# Altium PCB Team12.PcbDoc
Units mil, origin at the board's own origin, x right, y up, seen from the top; angles counter-clockwise.
Board outline 3900 x 3900 mil, 4 copper layers (Top Layer, GND, PWR, Bottom Layer); 54 components, 57 nets, 327 pads, 41 vias.
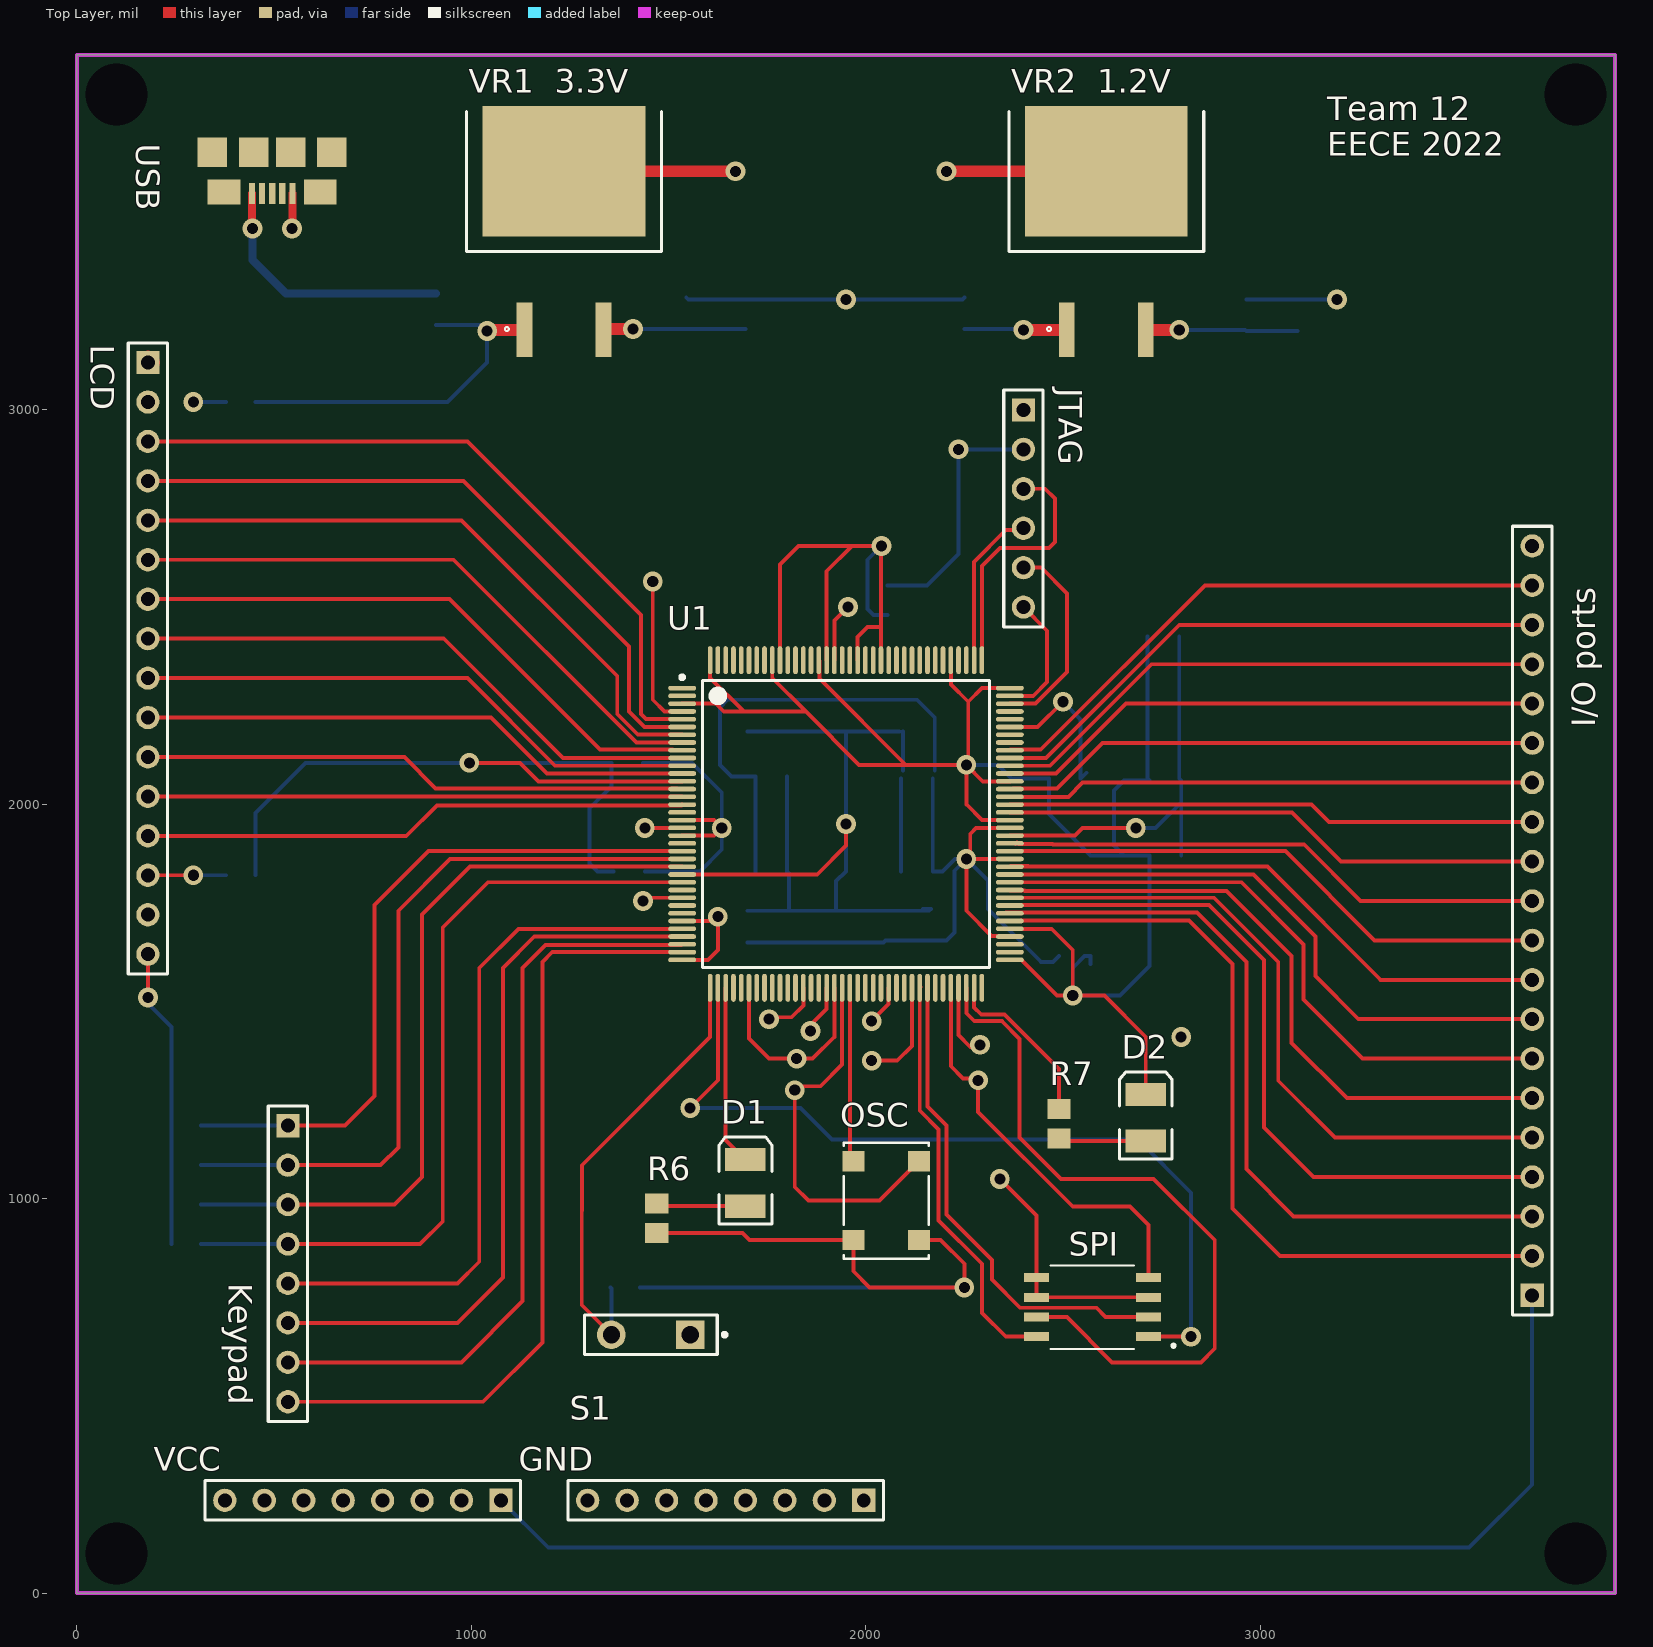
[diagram p0: Top Layer view]
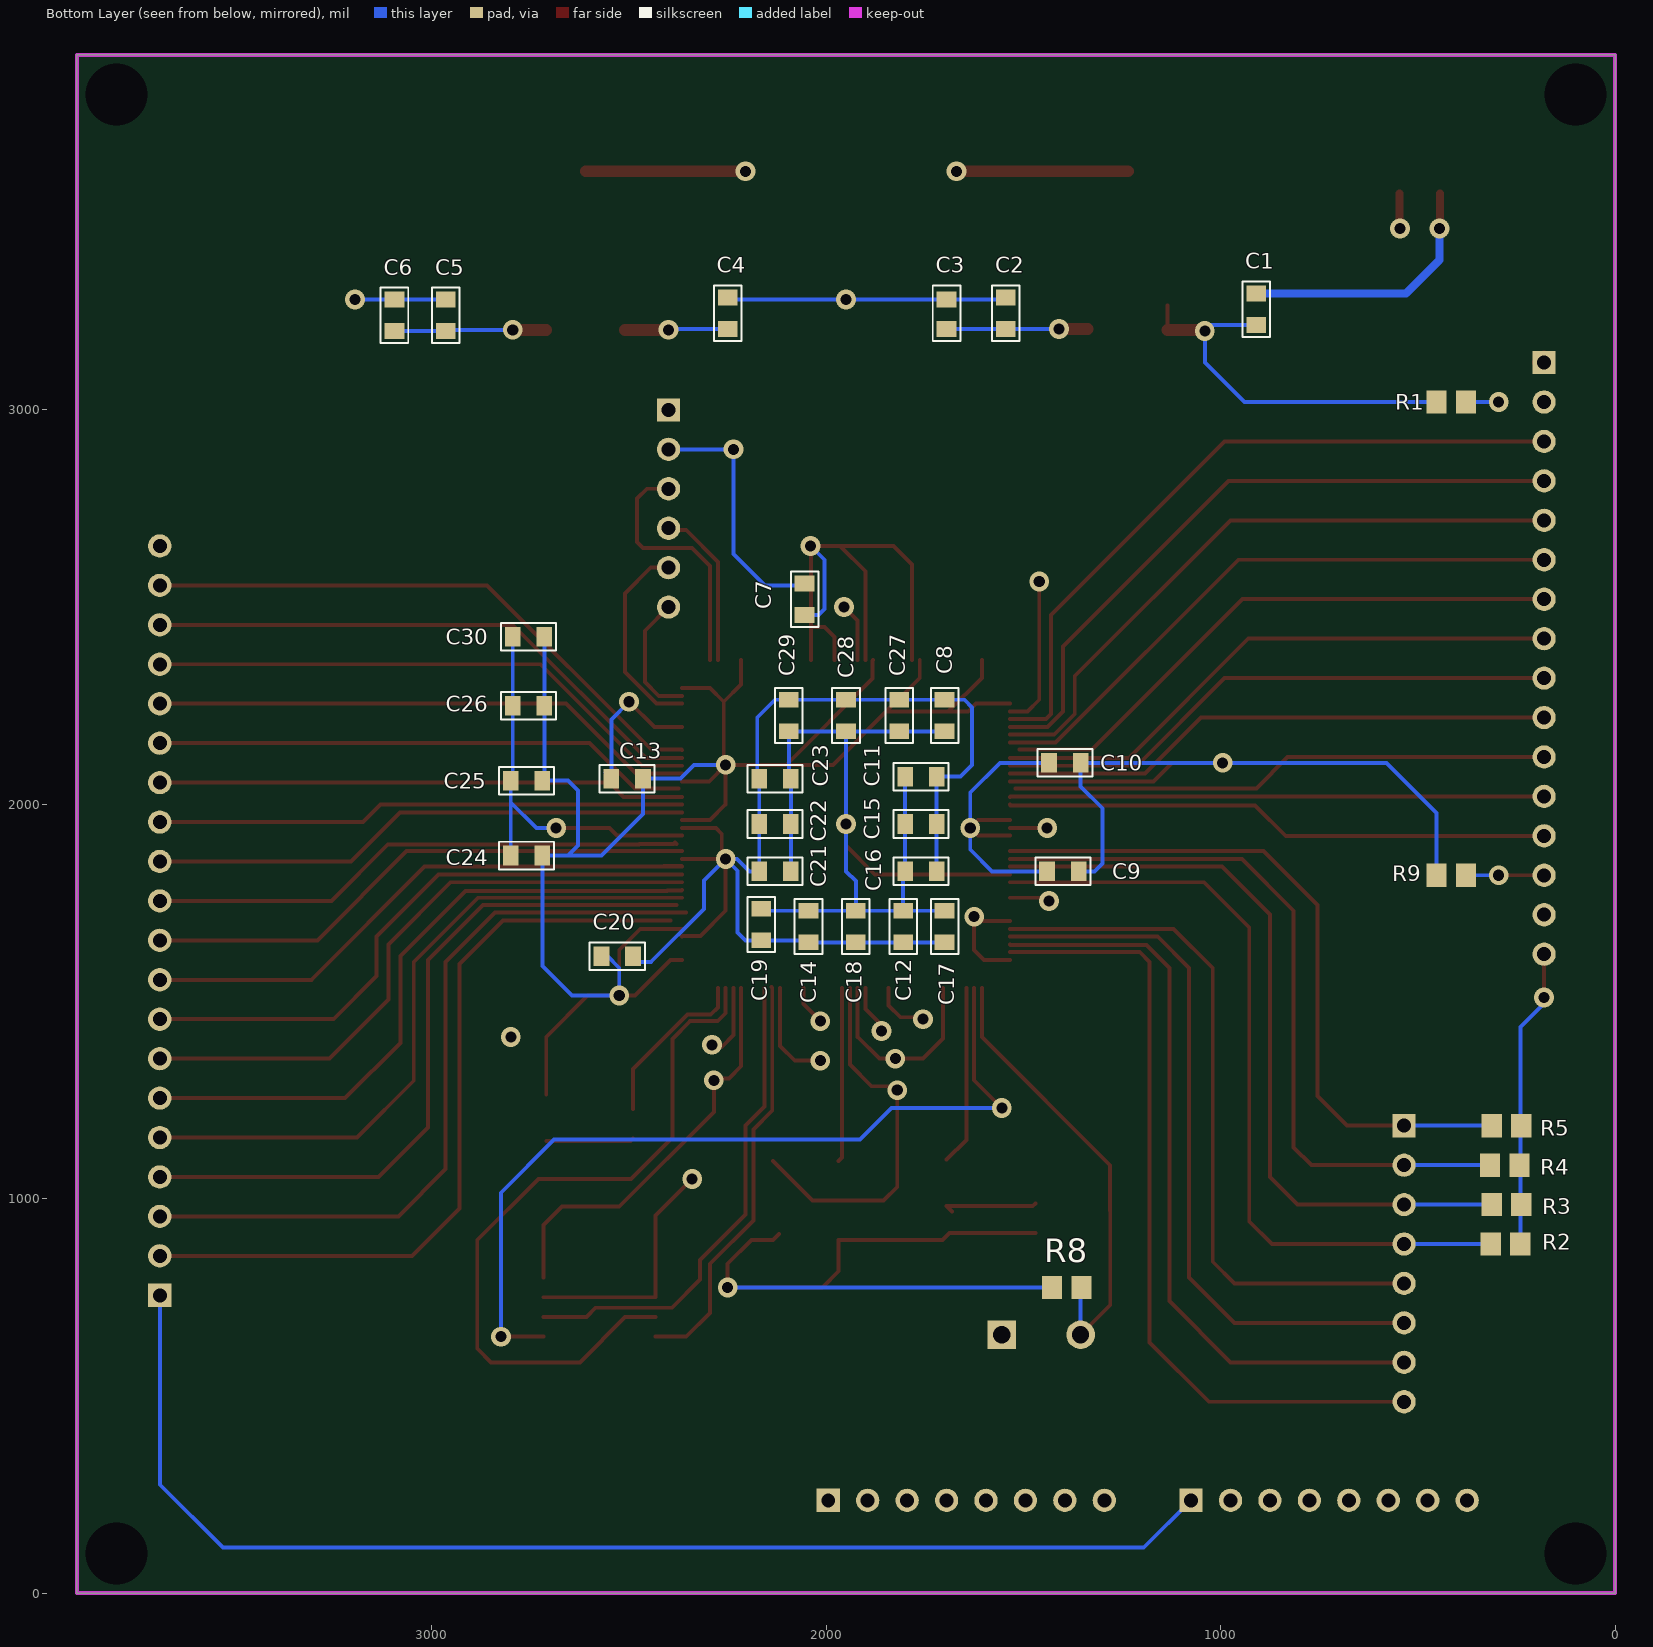
[diagram p1: Bottom Layer view, seen from below]
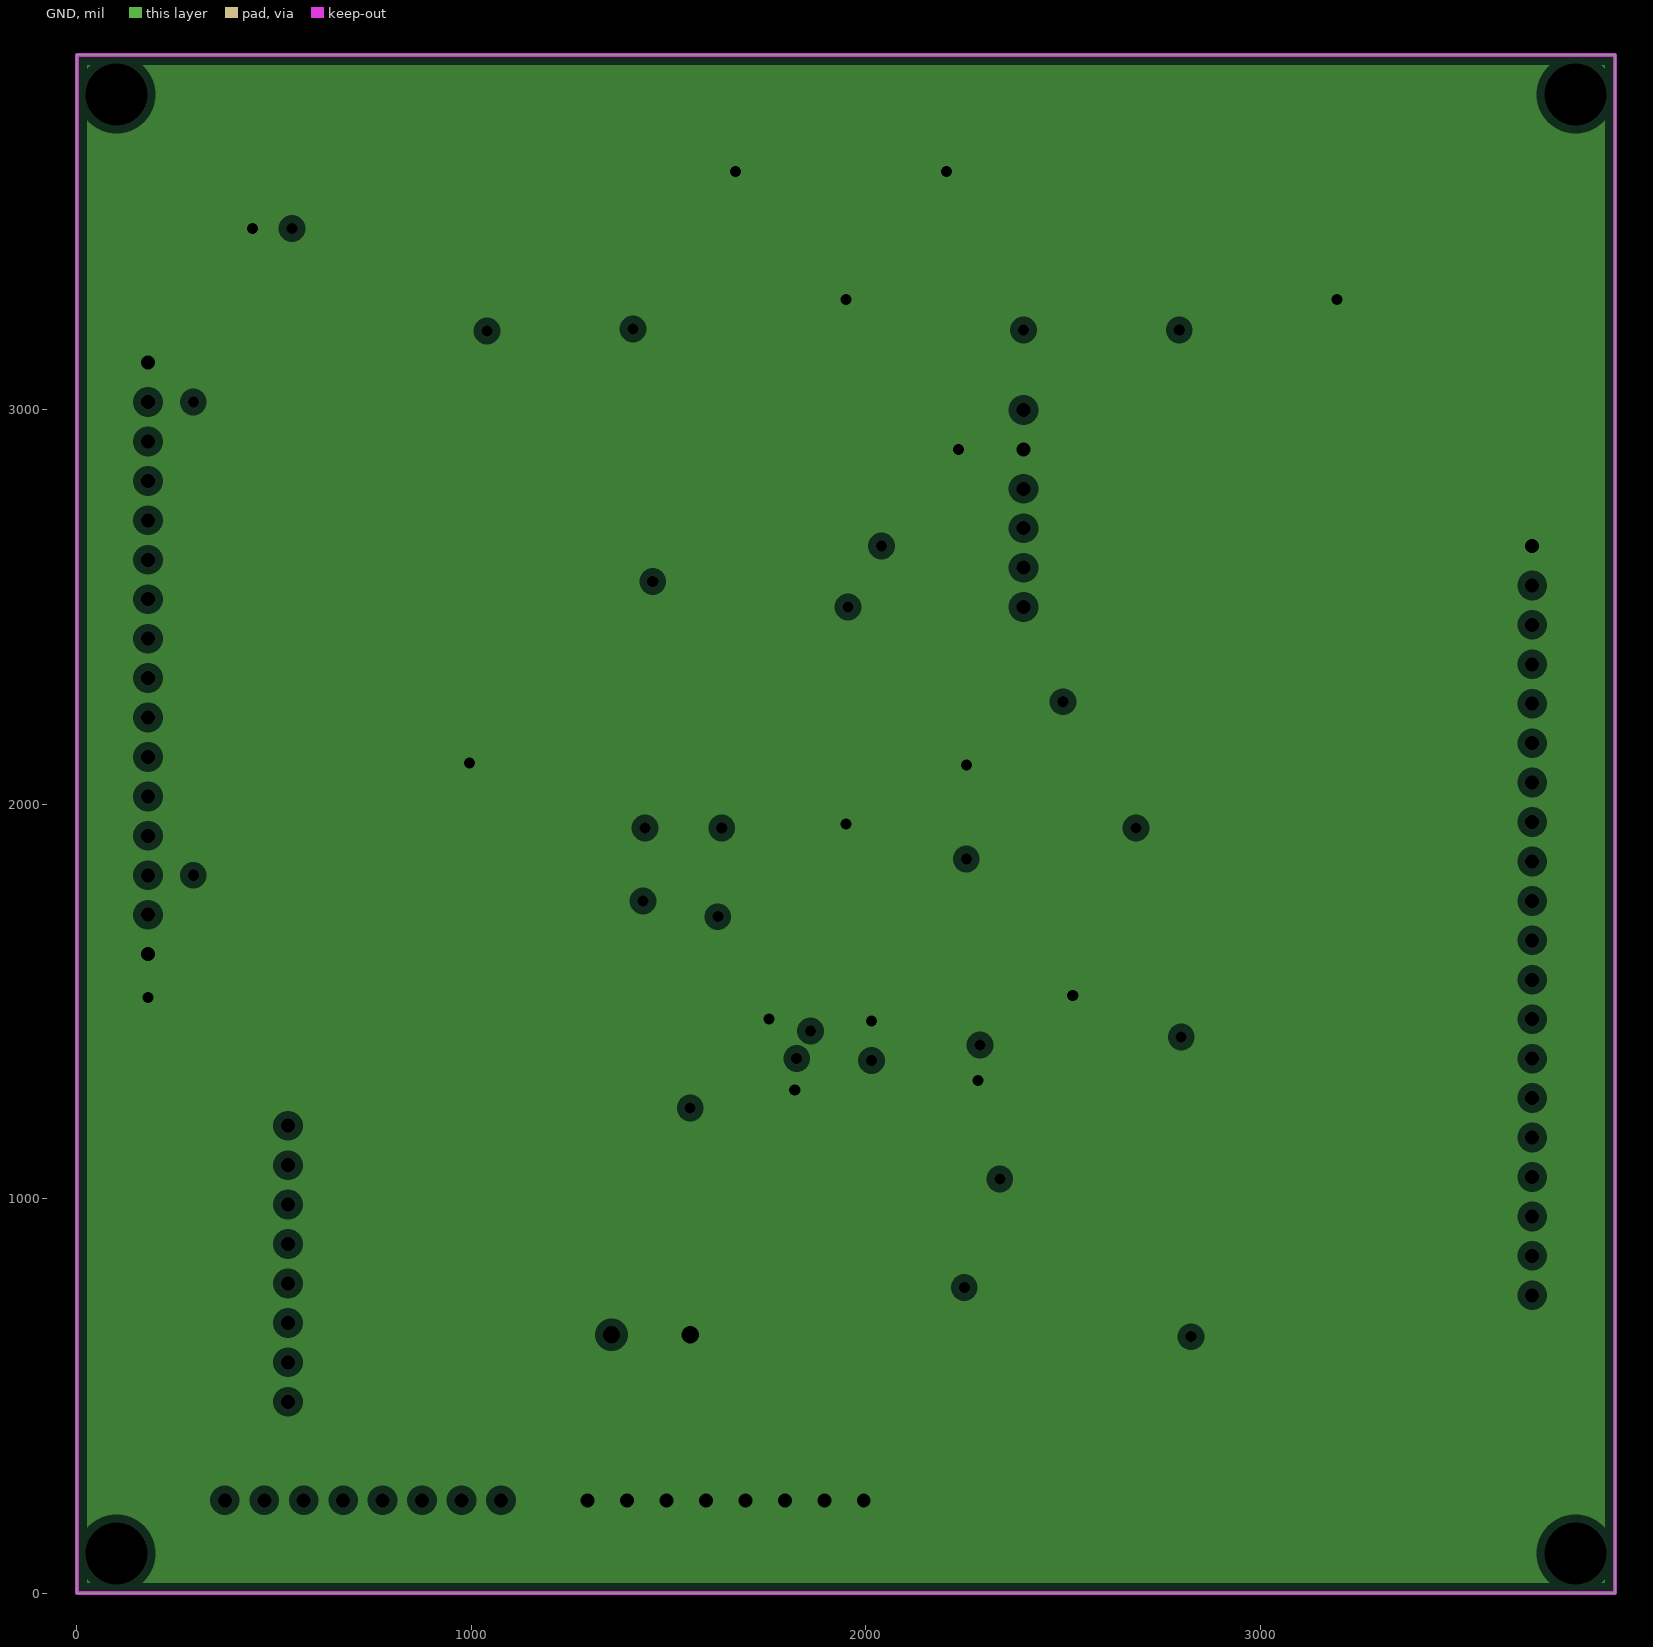
[diagram p2: GND, clearances drawn from the general rule]
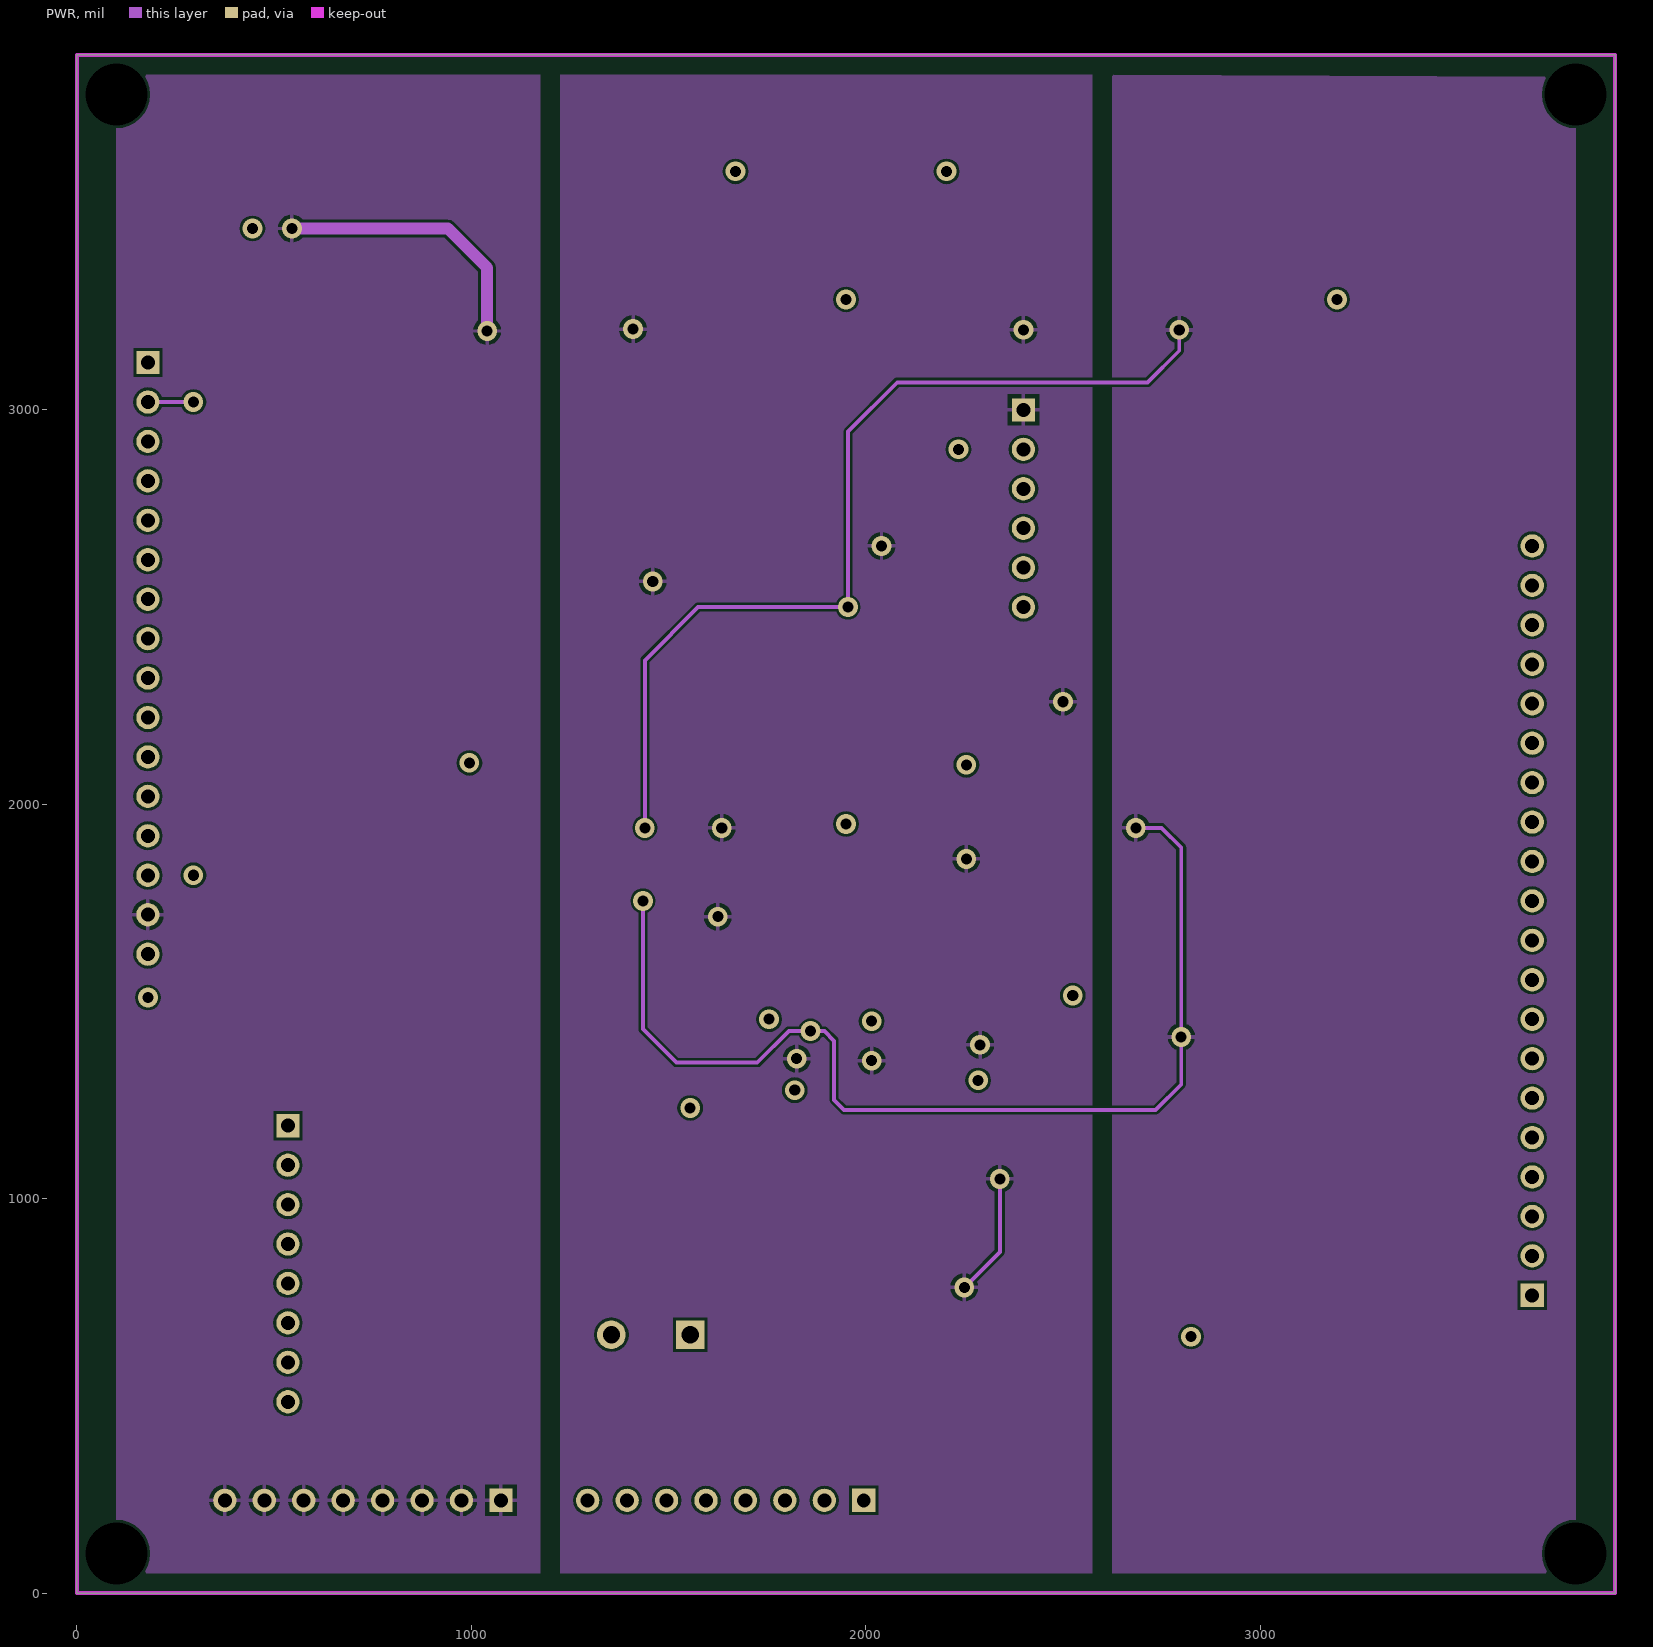
[diagram p3: PWR]

## Layer stack, top to bottom
Top Solder: solder mask 0.4, Solder Resist, Dk 3.5
Top Layer: signal copper 1.4
Dielectric 1: dielectric 12.6, FR-4, Dk 4.8
GND: plane copper 1.417, net GND
Dielectric 2: dielectric 12.6, Dk 4.2
PWR: signal copper 1.417
Dielectric 3: dielectric 12.6, Dk 4.2
Bottom Layer: signal copper 1.4
Bottom Solder: solder mask 0.4, Solder Resist, Dk 3.5

## Board outline
0,0 0,3900 3900,3900 3900,0

## Design rules (kind name [scope] priority, off if disabled: settings)
Clearance [All] p1: gap=7 ignorepadtopadclearanceinfootprint=FALSE
FabricationTestPointUsage [All] p1: valid=0 allowmultiple=TRUE
HoleSize [All] p1: absolutevalues=TRUE maxlimit=157.48 minlimit=1 maxpercent=80.000 minpercent=20.000
MinimumSolderMaskSliver [All] p1: minsoldermaskwidth=1
PlaneClearance [All] p1: clearance=20
PlaneConnect [All] p1: planeconnectstyle=Relief reliefexpansion=20 reliefentries=4 reliefconductorwidth=10 reliefairgap=10
PolygonConnect [All] p1: connectstyle=Relief reliefconductorwidth=10 reliefentries=4 polygonreliefangle="90 Angle" airgapwidth=10
RoutingVias [All] p1: holewidth=28 width=50 viastyle="Through Hole" minholewidth=28 minwidth=50 maxholewidth=28 maxwidth=50
SilkToSilkClearance [All] p1: silktosilkclearance=1
SilkToSolderMaskClearance [IsPad] p1: minsilkscreentomaskgap=1 clearancetoexposedcopper=TRUE
SolderMaskExpansion [All] p1: expansion=4
Width [All] p1: maxlimit=30 minlimit=10 preferedwidth=10
23 further rules are at their usual default settings.

## Components (designator, comment, footprint, x,y, rotation, side; value= is the part's Value field where it differs from the comment)
C1 "150uF" 0805C-TBD#1 910,3225 r90 bottom locked
C2 "150uF" 0805C-TBD#1 1545,3215 r90 bottom
C3 "10uF" 0805C-TBD#2 1695,3215 r90 bottom
C4 "150uF" 0805C-TBD#1 2250,3215 r90 bottom
C5 "150uF" 0805C-TBD#1 2965,3210 r90 bottom
C6 "10uF" 0805C-TBD#1 3095,3210 r90 bottom
C7 "4.7uF" 0805C-TBD#1 2055,2550 r270 bottom
C8 "4.7uF" 0805C-TBD#1 1700,2195 r90 bottom
C9 "0.47uF" 0805C-TBD#1 1370,1830 r0 bottom
C10 "0.47uF" 0805C-TBD#1 1365,2105 r0 bottom
C11 "4.7uF" 0805C-TBD#1 1790,2070 r180 bottom
C12 "4.7uF" 0805C-TBD#1 1805,1720 r270 bottom
C13 "4.7uF" 0805C-TBD#1 2475,2065 r0 bottom locked
C14 "4.7uF" 0805C-TBD#1 2045,1720 r270 bottom
C15 "4.7uF" 0805C-TBD#1 1790,1950 r180 bottom
C16 "4.7uF" 0805C-TBD#1 1790,1830 r180 bottom
C17 "0.47uF" 0805C-TBD#1 1700,1720 r270 bottom
C18 "0.47uF" 0805C-TBD#1 1925,1720 r270 bottom
C19 "4.7uF" 0805C-TBD#1 2165,1725 r270 bottom
C20 "0.47uF" 0805C-TBD#1 2560,1615 r180 bottom
C21 "0.47uF" 0805C-TBD#1 2100,1830 r0 bottom
C22 "0.47uF" 0805C-TBD#1 2100,1950 r0 bottom
C23 "4.7uF" 0805C-TBD#1 2100,2065 r0 bottom
C24 "4.7uF" 0805C-TBD#1 2730,1870 r0 bottom
C25 "4.7uF" 0805C-TBD#1 2730,2060 r0 bottom
C26 "4.7uF" 0805C-TBD#1 2725,2250 r0 bottom
C27 "0.47uF" 0805C-TBD#1 1815,2255 r270 bottom
C28 "0.47uF" 0805C-TBD#1 1950,2255 r270 bottom
C29 "4.7uF" 0805C-TBD#1 2095,2255 r270 bottom
C30 "0.47uF" 0805C-TBD#1 2725,2425 r0 bottom locked
D1 "LED3" DSO-C2/D5.6 1695,1040 r90 top
D2 "LED3" DSO-C2/D5.6 2710,1205 r90 top
GND "Header 8" HDR1X8 1995,235 r180 top
"I/O ports" "Header 20" HDR1X20 3690,755 r90 top locked
JTAG "Header 6" HDR1X6 2400,3000 r270 top locked
Keypad "Header 8" HDR1X8 535,1185 r270 top locked
LCD "Header 16" HDR1X16 180,3120 r270 top locked
OSC "CB3LV-3I-25M000000" CRYS_CB3LV-3I-01 2052,995 r180 top locked value=Value
R1 "330" ERA-0805 415,3020 r180 bottom
R2 "10K" ERA-0805 277.6,885 r0 bottom
R3 "10K" ERA-0805 275,985 r0 bottom
R4 "10K" ERA-0805 280,1085 r0 bottom
R5 "10K" ERA-0805 275,1185 r0 bottom
R6 "330" ERA-0805 1470,950 r270 top
R7 "330" ERA-0805 2490,1190 r90 top
R8 "4.7K" ERA-0805 1390,775 r0 bottom
R9 "5K" ERA-0805 415,1820 r180 bottom
S1 "SW-PB" SPST-2 1455,655 r180 top
SPI "SOIC127P790X216-8N" *SOIC127P790X216-8N 2575,725 r180 top
U1 "XC6SLX9-2TQG144C" TQG144_N 1950,1950 r0 top
USB "10118192-0001LF" 10118192-0001LF_10118192-0001LF(Primary) 495,3710 r180 top (schematic designator "USB Port B")
VCC "Header 8" HDR1X8 1075,235 r180 top
"VR1  3.3V" "3.3V" *D2PAK_MC7805ACD2TG(Primary) 1235,3355 r90 top (schematic designator VR1)
"VR2  1.2V" "1.2V" *D2PAK_MC7805ACD2TG(Primary) 2610,3355 r90 top (schematic designator VR2)

## Footprints (in the part's own frame and the unit in brackets; to place one, negate y for a bottom-side part, rotate by r counter-clockwise, add the part's x,y. Pads: shape width x height; smd on the part's side, far side on the other; paste and mask are expansions set on the pad)
0805C-TBD#1 [mil] "CAPACITOR 0805"
  rect 40x50 smd: 1(-10,0) 2(70,0)
  silkscreen extent -40,-35 100,35, body extent -11,-25 70,25, height 26
0805C-TBD#2 [mil] "CAPACITOR 0805"
  rect 40x50 smd: 1(-10,0) 2(65,0)
  silkscreen extent -40,-35 100,35, body extent -11,-25 70,25, height 26
10118192-0001LF_10118192-0001LF(Primary) [mm]
  rect 0.4x1.35 smd: 1(-1.3,4.1) 2(-0.65,4.1) 3(0,4.1) 4(0.65,4.1) 5(1.3,4.1)
  rect 1.9x1.9 smd: M1(-1.2,1.45) M2(1.2,1.45) S1(-3.85,1.45) S2(3.85,1.45)
  rect 2.1x1.6 smd: S3(-3.1,4) S4(3.1,4)
*D2PAK_MC7805ACD2TG(Primary) [mil]
  rect 137.95x40 smd: 1(-152.09,100) 3(-152.09,-100)
  rect 329.92x412.99 smd: TAB(250,0)
  silkscreen extent -155,-247 401,247
*SOIC127P790X216-8N [mm]
  rect 1.61x0.58 smd: 1(-3.605,1.905) 2(-3.605,0.635) 3(-3.605,-0.635) 4(-3.605,-1.905) 5(3.605,-1.905) 6(3.605,-0.635) 7(3.605,0.635) 8(3.605,1.905)
  silkscreen extent -5.32,-2.69 2.69,2.69
CRYS_CB3LV-3I-01 [mil]
  rect 55x51 smd paste+0 mask+0: 1(-83,100) 2(-83,-100) 3(83,-100) 4(83,100)
  silkscreen extent -108,-147 108,147, body extent 0,0 10,10, height 10
DSO-C2/D5.6 [mm] "SM LED; 2 C-Bend Leads; Body 3.5 x 2.8 x 1.9 mm, inc leads (LxWxH typ)"
  rect 1.5x2.6 smd: 1(-1.5,0) 2(1.5,0)
  silkscreen extent -2.65,-1.7 2.95,1.7
ERA-0805 [mm] "Chip Resistor; Body 2 x 1.3 mm (LxW typ)"
  rect 1.3x1.5 smd: 1(-0.95,0) 2(0.95,0)
HDR1X6 [mm] "Connector; Header; 6 Position"
  rect 1.5x1.5 hole 0.9: 1(0,0)
  round 1.5 hole 0.9: 2(2.54,0) 3(5.08,0) 4(7.62,0) 5(10.16,0) 6(12.7,0)
  silkscreen extent -1.27,-1.27 13.97,1.27
HDR1X8 [mm] "Connector; Header; 8 Position"
  rect 1.5x1.5 hole 0.9: 1(0,0)
  round 1.5 hole 0.9: 2(2.54,0) 3(5.08,0) 4(7.62,0) 5(10.16,0) 6(12.7,0) 7(15.24,0) 8(17.78,0)
  silkscreen extent -1.27,-1.27 19.05,1.27
HDR1X16 [mm] "Connector; Header; 16 Position"
  rect 1.5x1.5 hole 0.9: 1(0,0)
  round 1.5 hole 0.9: 2(2.54,0) 3(5.08,0) 4(7.62,0) 5(10.16,0) 6(12.7,0) 7(15.24,0) 8(17.78,0) 9(20.32,0) 10(22.86,0) 11(25.4,0) 12(27.94,0) 13(30.48,0) 14(33.02,0) 15(35.56,0) 16(38.1,0)
  silkscreen extent -1.27,-1.27 39.37,1.27
HDR1X20 [mm] "Connector; Header; 20 Position"
  rect 1.5x1.5 hole 0.9: 1(0,0)
  round 1.5 hole 0.9: 2(2.54,0) 3(5.08,0) 4(7.62,0) 5(10.16,0) 6(12.7,0) 7(15.24,0) 8(17.78,0) 9(20.32,0) 10(22.86,0) 11(25.4,0) 12(27.94,0) 13(30.48,0) 14(33.02,0) 15(35.56,0) 16(38.1,0) 17(40.64,0) 18(43.18,0) 19(45.72,0) 20(48.26,0)
  silkscreen extent -1.27,-1.27 49.53,1.27
SPST-2 [mm] "Circuit Breaker; 2 Leads"
  rect 1.85x1.85 hole 1.1: 1(-2.54,0)
  round 1.85 hole 1.1: 2(2.54,0)
  silkscreen extent -4.89,-1.27 4.28,1.27
TQG144_N [mm] "Thin QFP, 144-Leads, Body 20x20mm, Pitch 0.5mm, IPC Medium Density"
  oval 1.8x0.3 smd: 1(-10.55,8.75) 2(-10.55,8.25) 3(-10.55,7.75) 4(-10.55,7.25) 5(-10.55,6.75) 6(-10.55,6.25) 7(-10.55,5.75) 8(-10.55,5.25) 9(-10.55,4.75) 10(-10.55,4.25) 11(-10.55,3.75) 12(-10.55,3.25) 13(-10.55,2.75) 14(-10.55,2.25) 15(-10.55,1.75) 16(-10.55,1.25) 17(-10.55,0.75) 18(-10.55,0.25) 19(-10.55,-0.25) 20(-10.55,-0.75) 21(-10.55,-1.25) 22(-10.55,-1.75) 23(-10.55,-2.25) 24(-10.55,-2.75) 25(-10.55,-3.25) 26(-10.55,-3.75) 27(-10.55,-4.25) 28(-10.55,-4.75) 29(-10.55,-5.25) 30(-10.55,-5.75) 31(-10.55,-6.25) 32(-10.55,-6.75) 33(-10.55,-7.25) 34(-10.55,-7.75) 35(-10.55,-8.25) 36(-10.55,-8.75) 73(10.55,-8.75) 74(10.55,-8.25) 75(10.55,-7.75) 76(10.55,-7.25) 77(10.55,-6.75) 78(10.55,-6.25) 79(10.55,-5.75) 80(10.55,-5.25) 81(10.55,-4.75) 82(10.55,-4.25) 83(10.55,-3.75) 84(10.55,-3.25) 85(10.55,-2.75) 86(10.55,-2.25) 87(10.55,-1.75) 88(10.55,-1.25) 89(10.55,-0.75) 90(10.55,-0.25) 91(10.55,0.25) 92(10.55,0.75) 93(10.55,1.25) 94(10.55,1.75) 95(10.55,2.25) 96(10.55,2.75) 97(10.55,3.25) 98(10.55,3.75) 99(10.55,4.25) 100(10.55,4.75) 101(10.55,5.25) 102(10.55,5.75) 103(10.55,6.25) 104(10.55,6.75) 105(10.55,7.25) 106(10.55,7.75) 107(10.55,8.25) 108(10.55,8.75)
  oval 0.3x1.8 smd: 37(-8.75,-10.55) 38(-8.25,-10.55) 39(-7.75,-10.55) 40(-7.25,-10.55) 41(-6.75,-10.55) 42(-6.25,-10.55) 43(-5.75,-10.55) 44(-5.25,-10.55) 45(-4.75,-10.55) 46(-4.25,-10.55) 47(-3.75,-10.55) 48(-3.25,-10.55) 49(-2.75,-10.55) 50(-2.25,-10.55) 51(-1.75,-10.55) 52(-1.25,-10.55) 53(-0.75,-10.55) 54(-0.25,-10.55) 55(0.25,-10.55) 56(0.75,-10.55) 57(1.25,-10.55) 58(1.75,-10.55) 59(2.25,-10.55) 60(2.75,-10.55) 61(3.25,-10.55) 62(3.75,-10.55) 63(4.25,-10.55) 64(4.75,-10.55) 65(5.25,-10.55) 66(5.75,-10.55) 67(6.25,-10.55) 68(6.75,-10.55) 69(7.25,-10.55) 70(7.75,-10.55) 71(8.25,-10.55) 72(8.75,-10.55) 109(8.75,10.55) 110(8.25,10.55) 111(7.75,10.55) 112(7.25,10.55) 113(6.75,10.55) 114(6.25,10.55) 115(5.75,10.55) 116(5.25,10.55) 117(4.75,10.55) 118(4.25,10.55) 119(3.75,10.55) 120(3.25,10.55) 121(2.75,10.55) 122(2.25,10.55) 123(1.75,10.55) 124(1.25,10.55) 125(0.75,10.55) 126(0.25,10.55) 127(-0.25,10.55) 128(-0.75,10.55) 129(-1.25,10.55) 130(-1.75,10.55) 131(-2.25,10.55) 132(-2.75,10.55) 133(-3.25,10.55) 134(-3.75,10.55) 135(-4.25,10.55) 136(-4.75,10.55) 137(-5.25,10.55) 138(-5.75,10.55) 139(-6.25,10.55) 140(-6.75,10.55) 141(-7.25,10.55) 142(-7.75,10.55) 143(-8.25,10.55) 144(-8.75,10.55)
  silkscreen extent -10.67,-9.25 9.25,9.57, body extent -10,-10 10,10, height 1.6

## Part data
C1 C2 C3 C4 C5 C6 C7 C8 C9 C10 C11 C12 C13 C14 C15 C16 C17 C18 C19 C20 C21 C22 C23 C24 C25 C26 C27 C28 C29 C30: library part 0805C-27PF-50V-C0G-JOH, "CAPACITOR 0805 CERAMIC", Supplier 1=Digi-Key, Supplier 2=Digi-Key, Supplier Part Number 2=251R15S270FV4E-ND
D1 D2: "Typical BLUE SiC LED", DatasheetVersion=16-Apr-2002, LatestRevisionDate=17-Dec-2003, LatestRevisionNote="PCB Footprint replaced.", PackageReference=3.5X2.8X1.9, PackageVersion=16-Apr-2002, Published=8-Jun-2000, Publisher="Altium Limited"
GND Keypad VCC: "Header, 8-Pin", LatestRevisionDate=17-Jul-2002, LatestRevisionNote="Re-released for DXP Platform.", Publisher="Altium Limited"
"I/O ports": "Header, 20-Pin", LatestRevisionDate=17-Jul-2002, LatestRevisionNote="Re-released for DXP Platform.", Publisher="Altium Limited"
JTAG: "Header, 6-Pin", LatestRevisionDate=17-Jul-2002, LatestRevisionNote="Re-released for DXP Platform.", Publisher="Altium Limited"
LCD: "Header, 16-Pin", LatestRevisionDate=17-Jul-2002, LatestRevisionNote="Re-released for DXP Platform.", Publisher="Altium Limited"
OSC: "No Description Available", Manufacturer_Part_Number=CB3LV-3I-14M7456, Built_By=EMA_Kyle, Copyright="Copyright (C) 2018 Accelerated Designs. All rights reserved", RefDes=RefDes, SourceLibrary=CTS_Components_2020-2-18, Type=DEV, Vendor="CTS Components"
R1 R2 R3 R4 R5 R6 R7 R8 R9: library part ERA6Y, "Rectangular Thick Film Chip Resistor, 10 Ohm to 1M Ohm Range, 0.1% and 0.5% Tolerance, 0805 Size, 0.1 W", PackageDocument=Mar-2003, Code_IPC="2012 [0805]", ComponentLink1Description="Manufacturer Link", ComponentLink1URL=http://www.panasonic.com/industrial/components/resistive_products.htm, ComponentLink2Description=Datasheet, ComponentLink2URL=http://www.panasonic.com/industrial/components/pdf/AOA0000CE8.pdf, LatestRevisionDate=19-Mar-2004, LatestRevisionNote="Silkscreen size reduced.", Note="If flow soldering, adjust pad width of PCB Footprint to 0.7 - 0.8 times the width of the resistor.", PackageReference=ERA-0805, Published=17-Dec-2003, Publisher="Altium Limited"
S1: "Switch", LatestRevisionDate=17-Jul-2002, LatestRevisionNote="Re-released for DXP Platform.", PackageReference=SPST-2, Published=24-Mar-1999, Publisher="Altium Limited"
SPI: "IC FLASH 8M SPI 104MHZ 8SOIC"
U1: "Spartan-6 LX 1.2V FPGA, 102 User I/Os, 144-Pin TQFP (0.5mm Pitch), Speed Grade 2, Commercial Grade, Pb-Free", Supplier Part Number 1=XC6SLX9-2TQG144C-ND, Code_JEDEC=MS-026-BFB, ComponentLink1Description="Manufacturer Link", ComponentLink1URL=http://www.xilinx.com, ComponentLink2Description="Spartan-6 Datasheet", ComponentLink2URL=http://www.xilinx.com/support/documentation/data_sheets/ds160.pdf, ComponentLink3Description="Spartan-6 Documents", ComponentLink3URL=http://www.xilinx.com/support/documentation/spartan-6.htm, ComponentLink4Description="Xilinx.com Home", ComponentLink4URL=http://www.xilinx.com, DatasheetVersion="ver1.6, Nov-2010", PackageDescription="144-Pin Thin Quad Flat Pack (TQG144) - Pb-Free", PackageReference=TQG144, PackageVersion="ver1.2, Jun-2004", Published=17-Nov-2009, Publisher="Altium Limited", Supplier 1=Digi-Key
USB: "Conn Micro USB Type B RCP 5 POS 0.65mm Solder RA SMD 5 Terminal 1 Port T/R", Package=None, Availability=Good, MF=Amphenol, MP=10118192-0001LF, Price="0.23 USD", SnapEDA_Link=https://www.snapeda.com/parts/10118192-0001LF/Amphenol%20Solar/view-part/?ref=snap
"VR1  3.3V" "VR2  1.2V": library part MC7805ACD2TG, "Linear Voltage Regulator IC Positive Fixed 1 Output 1A D2PAK", Package="D2PAK ON Semiconductor", Availability=Unavailable, MF="ON Semiconductor", MP=MC7805ACD2TG, Price=None, SnapEDA_Link=https://www.snapeda.com/parts/MC7805ACD2TG/ON%20Semiconductor/view-part/104394/?ref=snap

## Free pads (board coordinates)
  round 0 hole 157.48: 33(100,3800) 34(3800,3800) 35(3800,100) 37(100,100)

## Via types
v1: diameter 50, hole 28, Top Layer to Bottom Layer, 41 vias

## Nets (pads, with @x,y where several pads share a name; then routed paths per layer and width w, separated by ;. In a path a pad name is that pad's centre, name@x,y a point inside that pad or via, vN(x,y) a via of type N, cw(c..) or ccw(c..) an arc to the next point about the centre after c; other vN are vias at no path point)
+1.2: "VR2  1.2V.3" C5.1 C6.1 C24.2 C25.2 C26.2 C30.2 U1.19 U1.28 U1.52 U1.89 U1.128 | length 6996.5
  Top Layer w10: v1(1435,1755) 1442.99,1762.99 U1.28 ; v1(1440,1940) 1440.16,1940.16 U1.19 ; v1(1860,1425) 1860,1440 1900.79,1480.79 U1.52 ; U1.128 1920.47,2465.47 v1(1955,2500) ; U1.89 2530.47,1920.47 2550,1940 v1(2685,1940)
  Top Layer w30: 2710,3202.91 v1(2795,3202.91)
  PWR w10: v1(1435,1755) 1435,1430 1520,1345 1725,1345 1805,1425 v1(1860,1425) 1895,1425 1920,1400 1920,1250 1945,1225 2735,1225 2800,1290 v1(2800,1410) 2800,1890 2750,1940 v1(2685,1940) ; v1(1440,1940) 1440,2365 1575,2500 v1(1955,2500) 1955,2945 2080,3070 2715,3070 2795,3150 v1(2795,3202.91)
  Bottom Layer w10: v1(2685,1940) 2735,1940 2800,2005 ; C30.2 C26.2 2795,2065 C25.2 2800,2005 ; v1(2795,3202.91) 2962.09,3202.91 C5.1 C6.1 ; C24.2 2800,2005
+3.3: "VR1  3.3V.3" "VR2  1.2V.1" C2.1 C3.1 C4.1 C7.2 C8.2 C9.2 C10.2 C11.2 C12.2 C13.2 C14.2 C15.2 C16.2 C17.2 C18.2 C19.2 C20.2 C21.2 C22.2 C23.2 C27.1 C28.1 C29.1 JTAG.1 OSC.1 OSC.4 R6.2 R8.2 SPI.3 SPI.5 SPI.6 U1.4 U1.18 U1.20 U1.31 U1.36 U1.42 U1.53 U1.63 U1.69 U1.76 U1.86 U1.90 U1.103 U1.122 U1.125 U1.129 U1.135 | length 11017.3
  Top Layer w10: 1335,3202.91 1337.09,3205 ; v1(1460,2565) 1460,2265.13 1489.7,2235.43 U1.4 ; R6.2 1687.4,912.6 1705,895 OSC.4 1969,816 2010,775 v1(2250,775) 2250,835 2190,895 OSC.1 OSC.1@2120,910 ; U1.36 1600.51,1605.51 1625,1630 v1(1625,1715) 1613.94,1703.94 U1.31 ; U1.20 1615.47,1920.47 v1(1635,1940) 1615.16,1959.84 U1.18 ; U1.42 1703.94,1406.06 1755,1355 v1(1825,1355) 1865,1355 1920.47,1410.47 U1.53 ; U1.135 1782.68,2607.68 1830,2655 1965,2655 ; U1.129 1900,2366.14 1900,2590 1965,2655 ; U1.125 1979.53,2424.53 2005,2450 2038.58,2450 ; v1(2015,1350) 2080,1350 2117.32,1387.32 U1.63 ; U1.122 2038.58,2450 ; U1.69 2235.43,1414.57 2265,1385 2285,1385 v1(2290,1390) ; v1(2340,1050) 2433.07,956.93 SPI.5 SPI.6 SPI.3 ; U1.76 2363.57,1666.35 2318.62,1666.35 2255,1729.97 v1(2255,1861.42) ; U1.86 v1(2255,1861.42) ; U1.90 2280.16,1940.16 2265,1925 2265,1871.42 v1(2255,1861.42) ; U1.103 2436.06,2196.06 v1(2500,2260) ; 1965,2655 v1(2040,2655) 2038.58,2653.58 2038.58,2450
  Top Layer w30: 1337.09,3205 v1(1410,3205) ; v1(2400,3202.91) 2510,3202.91
  PWR w10: v1(2250,775) 2340,865 v1(2340,1050)
  Bottom Layer w10: v1(1410,3205) C2.1 C3.1 ; R8.2 v1(2250,775) ; C10.2 1560,2105 1635,2030 v1(1635,1940) 1635,1885 1580,1830 C9.2 ; C17.2 C12.2 C18.2 C14.2 2050,1655 C19.2 2205,1655 2225,1675 2225,1831.42 v1(2255,1861.42) ; C16.2 C15.2 C11.2 1660,2070 1630,2100 1630,2245 1650,2265 C8.2 C27.1 C28.1 C29.1 2130,2265 2175,2220 C23.2@2175,2085 ; v1(2040,2655) 2005,2620 2005,2495 2020,2480 C7.2 ; C23.2 C22.2 C21.2 2195,1830 2226.42,1861.42 v1(2255,1861.42) ; C4.1 2397.91,3205 v1(2400,3202.91) ; C20.2 2475,1600 2445,1600 2310,1735 2310,1806.42 v1(2255,1861.42) ; v1(2500,2260) 2545,2215 C13.2 C13.2@2560,2080
CCLK: SPI.7 U1.70 | length 1868.1
  Top Layer w10: U1.70 2255.12,1470.12 2275.24,1450 2345,1450 2390,1405 2390,1155 2495,1050 2730,1050 2885,895 2885,620 2850,585 2625,585 2510,700 SPI.7
"COL 1": Keypad.5 U1.32 | length 1808.5
  Top Layer w10: Keypad.5 965,785 1020,840 1020,1585 1119.25,1684.25 U1.32
"COL 2": Keypad.6 U1.33 | length 1865.2
  Top Layer w10: Keypad.6 965,685 1080,800 1080,1585 1159.57,1664.57 U1.33
"COL 3": Keypad.7 U1.34 | length 1933.7
  Top Layer w10: Keypad.7 975,585 1130,740 1130,1585 1188.1,1643.1 1532.87,1643.1 U1.34
"COL 4": Keypad.8 U1.35 | length 2037.2
  Top Layer w10: Keypad.8 1030,485 1180,635 1180,1600 1205.2,1625.2 U1.35
CSO_B: SPI.1 U1.38 | length 2165.8
  Top Layer w10: v1(1555,1230) 1625.2,1300.2 U1.38 ; SPI.1 v1(2825,650)
  Bottom Layer w10: v1(1555,1230) 1835,1230 1915,1150 2690,1150 2825,1015 v1(2825,650)
D0: LCD.10 U1.12 | length 1398.5
  Top Layer w10: LCD.10@195,2220 1050,2220 1192.05,2077.95 U1.12
D1: LCD.9 U1.11 | length 1431.8
  Top Layer w10: LCD.9@195,2320 990,2320 1212.36,2097.64 U1.11
D2: LCD.8 U1.10 | length 1465
  Top Layer w10: LCD.8@195,2420 930,2420 1232.68,2117.32 U1.10
D3: LCD.7 U1.9 | length 1472.9
  Top Layer w10: LCD.7@195,2520 945,2520 1326.21,2138.79 U1.9@1510,2138.79
D4: LCD.6 U1.8 | length 1531.6
  Top Layer w10: LCD.6@195,2620 955,2620 1418.31,2156.69 U1.8
D5: LCD.5 U1.7 | length 1621
  Top Layer w10: LCD.5@195,2720 975,2720 1370,2325 1370,2229.04 1422.66,2176.38 U1.7
D6: LCD.4 U1.6 | length 1694.7
  Top Layer w10: LCD.4@195,2820 980,2820 1400,2400 1400,2235 1438.94,2196.06 U1.6
D7: LCD.3 U1.5 | length 1778.4
  Top Layer w10: LCD.3@195,2920 990,2920 1430,2480 1430,2229.04 1443.29,2215.75 U1.5
DIN: SPI.2 U1.65 | length 1243.6
  Top Layer w10: U1.65 2156.69,1233.31 2205,1185 2205,960 2320,845 2320,795 2391.58,723.42 2585,723.42 2608.42,700 SPI.2
EN: LCD.11 U1.14 | length 1358
  Top Layer w10: LCD.11@195,2120 830,2120 909.64,2040.36 U1.14@1520,2040.36
GCLK: OSC.3 U1.55 | length 443.4
  Top Layer w10: U1.55 1959.84,1104.16 OSC.3
GND: "I/O ports.20" "VR1  3.3V.TAB" "VR2  1.2V.TAB" C1.2 C2.2 C3.2 C4.2 C5.2 C6.2 C7.1 C8.1 C9.1 C10.1 C11.1 C12.1 C13.1 C14.1 C15.1 C16.1 C17.1 C18.1 C19.1 C20.1 C21.1 C22.1 C23.1 C24.1 C25.1 C26.1 C27.2 C28.2 C29.2 C30.1 D2.2 GND.1 GND.2 GND.3 GND.4 GND.5 GND.6 GND.7 GND.8 JTAG.2 LCD.1 LCD.16 OSC.2 R2.1 R3.1 R4.1 R5.1 R9.1 S1.1 SPI.4 U1.3 U1.13 U1.25 U1.49 U1.54 U1.60 U1.68 U1.73 U1.77 U1.91 U1.96 U1.108 U1.113 U1.130 U1.136 U1.144 USB.5 | length 15829.7
  Top Layer w10: v1@180,1495.39 v1(180,1510) LCD.16 ; v1(995,2105) 1123.27,2105 1170,2058.27 U1.13 ; GND.8@1295,215 GND.8 ; GND.7@1395,215 GND.7 ; GND.6@1495,215 GND.6 ; U1.25 1877.05,1822.05 1950,1895 v1(1950,1950) ; U1.3 1619.88,2255.12 1640,2235 1690.92,2235 ; GND.5@1595,215 GND.5 ; U1.144 1605.51,2320.4 1690.92,2235 ; GND.4@1695,215 GND.4 ; U1.136 1762.99,2320.4 1848.4,2235 ; v1@1770,1460 1812.04,1460 1841.73,1489.7 U1.49 ; GND.3@1795,215 GND.3 ; U1.130 1882.88,2363.57 1882.88,2318.62 2101.51,2100 ; GND.2@1895,215 GND.2 ; U1.54 1940.16,1340.16 1885,1285 1820,1285 v1(1820,1275) 1820,1030 1855,995 2035,995 OSC.2 ; GND.1@1995,215 GND.1 ; v1(2015,1450) 2058.27,1493.27 U1.60 ; U1.68 2215.75,1335.75 2246.5,1305 2290,1305 v1(2285,1300) 2285,1220 2525,980 2670,980 2716.93,933.07 SPI.4 ; U1.113 2215.75,2304.25 2260,2260 ; U1.73 2394.49,1605.51 2485,1515 v1(2525,1515) ; U1.77 2365.75,1684.25 2366.65,1683.35 2471.65,1683.35 2525,1630 v1(2525,1515) ; U1.91 2295.16,1959.84 2255,2000 v1(2255,2100) ; U1.96 2296.73,2058.27 v1(2255,2100) ; U1.108 2294.49,2294.49 2260,2260 ; D2.2 2710,1410 2605,1515 v1(2525,1515) ; 1690.92,2235 1848.4,2235 ; 1848.4,2235 1983.4,2100 2101.51,2100 ; 2101.51,2100 v1(2255,2100) ; v1(2255,2100) 2260,2105 2260,2260
  Top Layer w20: v1@443.82,3461.18 USB.5
  Top Layer w30: LCD.1@180,3135 LCD.1@195,3120 ; 1235,3605 v1(1670,3605) ; v1(2205,3605) 2610,3605
  Bottom Layer w10: v1@180,1495.39 240.2,1435.2 R2.1 ; R9.1 452.4,1977.4 580,2105 v1(995,2105) C10.1 1355,2045 1300,1990 1300,1850 1320,1830 C9.1 ; C2.2 1550,3280 C3.2 v1(1950,3280) 2245,3280 C4.2 ; C17.1 C12.1 ; C8.1 C27.2 C28.2 ; C11.1 C15.1 C16.1 1805,1825 C12.1 ; C7.1@2055,2555 2155,2555 2235,2635 v1(2235,2900) JTAG.2 ; C21.1 C22.1 C23.1 ; C23.1@2095,2085 C29.2@2095,2182.5 ; C29.2 C29.2@2095,2182.5 ; C19.1@2145,1735 C19.1 ; C19.1@2160,1730 C14.1 C18.1 ; v1(2255,2100) 2335,2100 2370,2065 C13.1 2465,1975 2570,1870 2655,1870 ; C20.1@2570,1595 C20.1 2555,1615 2525,1585 v1(2525,1515) 2645,1515 2720,1590 C24.1 2655,1870 ; C30.1 C26.1 2715,2065 C25.1 2655,2060 2630,2035 2630,1895 2655,1870 ; C5.2 C6.2 v1(3195,3280) ; C12.1 C18.1 ; C18.1 1925,1805 1950,1830 v1(1950,1950) C28.2 ; C28.2 2085,2185 2094.41,2182.65 C29.2@2095,2182.5
  Bottom Layer w20: v1(445,3460) 445,3380 530,3295 C1.2
  other v1: 1755,1455
INT_B_2: D1.2 U1.39 | length 456.4
  Top Layer w10: U1.39 1644.88,1149.17 D1.2
"IO 1": "I/O ports.2" U1.78 | length 2010.6
  Top Layer w10: U1.78@2395,1705.72 2819.28,1705.72 2930,1595 2930,975 3050,855 3690,855
"IO 2": "I/O ports.3" U1.79 | length 1961.6
  Top Layer w10: U1.79@2355,1725.4 2839.6,1725.4 2965,1600 2965,1075 3085,955 3690,955
"IO 3": "I/O ports.4" U1.80 | length 1844.8
  Top Layer w10: U1.80@2380,1745.09 2869.91,1745.09 3010,1605 3010,1180 3135,1055 3690,1055
"IO 4": "I/O ports.5" U1.81 | length 1752.8
  Top Layer w10: U1.81 2882.99,1762.99 3045.98,1600 3045.98,1299.02 3190,1155 3690,1155
"IO 5": "I/O ports.6" U1.82 | length 1672.6
  Top Layer w10: U1.82 2367.13,1780.9 2403.2,1780.9 2403.2,1780 2915,1780 3080,1615 3080,1395 3220,1255 3690,1255
"IO 6": "I/O ports.7" U1.83 | length 1592
  Top Layer w10: U1.83 2952.64,1802.36 3110,1645 3110,1505 3260,1355 3690,1355
"IO 7": "I/O ports.8" U1.84 | length 1535.3
  Top Layer w10: U1.84 2982.95,1822.05 3140,1665 3140,1565 3250,1455 3690,1455
"IO 8": "I/O ports.9" U1.85 | length 1490.9
  Top Layer w10: 2412.08,1843.51 2367.13,1843.51 U1.85 3018.27,1841.73 3305,1555 3690,1555
"IO 9": "I/O ports.10" U1.87 | length 1418.3
  Top Layer w10: U1.87 3063.9,1881.1 3290,1655 3690,1655
"IO 10": "I/O ports.11" U1.88 | length 1372.6
  Top Layer w10: U1.88@2380,1899.01 2383.56,1902.57 2387.12,1899.01 2474.09,1899.01 2475,1898.1 3111.9,1898.1 3255,1755 3690,1755
"IO 11": "I/O ports.12" U1.92 | length 1376.2
  Top Layer w10: U1.92 3080.47,1979.53 3205,1855 3690,1855
"IO 12": "I/O ports.13" U1.93 | length 1343
  Top Layer w10: U1.93 3130.79,1999.21 3175,1955 3690,1955
"IO 13": "I/O ports.14" U1.94 | length 1339.6
  Top Layer w10: U1.94 2513.9,2018.9 2550,2055 3690,2055
"IO 14": "I/O ports.15" U1.95 | length 1362.5
  Top Layer w10: U1.95@2375,2040.36 2485.36,2040.36 2600,2155 3690,2155
"IO 15": "I/O ports.16" U1.97 | length 1398
  Top Layer w10: U1.97 2482.95,2077.95 2660,2255 3690,2255
"IO 16": "I/O ports.17" U1.98 | length 1431.2
  Top Layer w10: U1.98 2466.98,2097.64 2724.35,2355 3690,2355
"IO 17": "I/O ports.18" U1.99 | length 1464.5
  Top Layer w10: U1.99 2457.32,2117.32 2795,2455 3690,2455
"IO 18": "I/O ports.19" U1.100 | length 1497.8
  Top Layer w10: U1.100 2367.13,2138.79 2443.79,2138.79 2860,2555 3690,2555
MOSI: SPI.8 U1.64 | length 1055.5
  Top Layer w10: U1.64@2138.79,1536.43 U1.64 2137.01,1222.99 2185,1175 2185,945 2295,835 2295,710 2355,650 SPI.8
NetD1_1: D1.1 R6.1 | length 246.5
  Top Layer w10: R6.1 1476.46,980.94 D1.1 D1.1@1681.65,967.6
NetD2_1: D2.1 R7.1 | length 222.8
  Top Layer w10: R7.1 2496.65,1145.94 D2.1
NetLCD_2: LCD.2 R1.2 | length 182.6
  PWR w10: LCD.2@195,3020 v1(295,3020)
  Bottom Layer w10: v1(295,3020) R1.2
NetLCD_14: LCD.14 R9.2 | length 182.6
  Top Layer w10: LCD.14@195,1820 v1(295,1820)
  Bottom Layer w10: v1(295,1820) R9.2
NetR7_2: R7.2 U1.71 | length 431
  Top Layer w10: U1.71 2274.8,1485.2 2293,1467 2352.04,1467 2490,1329.04 R7.2
PROGRAM_B_2: R8.1 S1.2 U1.37 | length 1166.5
  Top Layer w10: S1.2 1280,730 1280,969.8 1280.2,970 1280.2,1084.69 1605.51,1410 U1.37
  Bottom Layer w10: R8.1 1355,772.6 S1.2
RE: LCD.12 U1.15 | length 1340.1
  Top Layer w10: LCD.12@195,2020 1533.54,2020 U1.15
"ROW 1": Keypad.1 R5.2 U1.22 | length 1792.1
  Top Layer w10: Keypad.1 680,1185 755,1260 755,1745 891.1,1881.1 U1.22
  Bottom Layer w10: R5.2@315,1185 Keypad.1
"ROW 2": Keypad.2 R4.2 U1.23 | length 1892.9
  Top Layer w10: Keypad.2 770,1085 815,1130 815,1730 946.42,1861.42 U1.23
  Bottom Layer w10: R4.2@314.8,1085 R4.2 Keypad.2
"ROW 3": Keypad.3 R3.2 U1.24 | length 1964.3
  Top Layer w10: Keypad.3 805,985 875,1055 875,1720 996.73,1841.73 U1.24
  Bottom Layer w10: R3.2@314.8,985 Keypad.3
"ROW 4": Keypad.4 R2.2 U1.26 | length 2036
  Top Layer w10: Keypad.4 870,885 927.5,942.5 927.5,1687.5 1042.36,1802.36 U1.26
  Bottom Layer w10: R2.2 Keypad.4
RS: LCD.13 U1.16 | length 1372.5
  Top Layer w10: LCD.13@195,1920 835,1920 912.43,1997.43 1532.87,1997.43 U1.16
TCK: JTAG.3 U1.109 | length 650.1
  Top Layer w10: U1.109 2294.49,2604.49 2340,2650 2465,2650 2480,2665 2480,2775 2455,2800 JTAG.3
TDI: JTAG.4 U1.110 | length 407.9
  Top Layer w10: U1.110 2274.8,2614.8 2355,2695 JTAG.4@2400,2695
TDO: JTAG.5 U1.106 | length 514.7
  Top Layer w10: U1.106 2430.12,2255.12 2510,2335 2510,2535 2445,2600 JTAG.5
TMS: JTAG.6 U1.107 | length 324.1
  Top Layer w10: U1.107 2424.8,2274.8 2460,2310 2460,2440 JTAG.6
VCC: "I/O ports.1" "VR1  3.3V.1" C1.1 LCD.15 R1.1 USB.1 VCC.1 VCC.2 VCC.3 VCC.4 VCC.5 VCC.6 VCC.7 VCC.8 | length 5000
  Top Layer w10: v1(545,3460) v1@546.18,3461.18 ; 1135,3202.91 1135,3265
  Top Layer w20: v1@546.18,3461.18 USB.1
  Top Layer w30: v1(1040,3200) 1042.91,3202.91 1135,3202.91
  PWR w30: v1(545,3460) 940,3460 1040,3360 v1(1040,3200)
  Bottom Layer w10: R1.1 940,3020 1040,3120 v1(1040,3200) 1025,3215 C1.1 ; VCC.1 1195,115 3530,115 3690,275 3690,755
pads on no net: U1.1 U1.2 U1.17 U1.21 U1.27 U1.29 U1.30 U1.40 U1.41 U1.43 U1.44 U1.45 U1.46 U1.47 U1.48 U1.50 U1.51 U1.56 U1.57 U1.58 U1.59 U1.61 U1.62 U1.66 U1.67 U1.72 U1.74 U1.75 U1.101 U1.102 U1.104 U1.105 U1.111 U1.112 U1.114 U1.115 U1.116 U1.117 U1.118 U1.119 U1.120 U1.121 U1.123 U1.124 U1.126 U1.127 U1.131 U1.132 U1.133 U1.134 U1.137 U1.138 U1.139 U1.140 U1.141 U1.142 U1.143 USB.2 USB.3 USB.4 USB.M1 USB.M2 USB.S1 USB.S2 USB.S3 USB.S4

## Polygon pours and split planes (outlines as drawn)
+1.2 on PWR "+1.2" (solid, pour order 4): 2625,3850 3800,3845 3800,50 2625.33,50 2625,100
+3.3 on PWR "+3.3" (solid, pour order 2): 1225,3850 2575,3850 2575,50 1225,50
VCC on PWR "VCC" (solid, pour order 0): 100,3850 1175,3850 1175,50 100,50 100,100
GND on GND (split plane): 3874.92,25.08 25.08,25.08 25.08,3874.92 3874.92,3874.92

## Keep-outs
Keep-Out Layer:
  the board outline again, w10

## Silkscreen, mask and mechanical layers (free items; w line width, h text height)
Top Overlay:
  text "Team 12 / EECE 2022" at 3170,3645 h60